# Altium PCB SideLine.PcbDoc
Units mm, origin at the board's own origin, x right, y up, seen from the top; angles counter-clockwise.
Board outline 84 x 12 mm, 2 copper layers (Top Layer, Bottom Layer); 57 components, 30 nets, 158 pads, 112 vias.
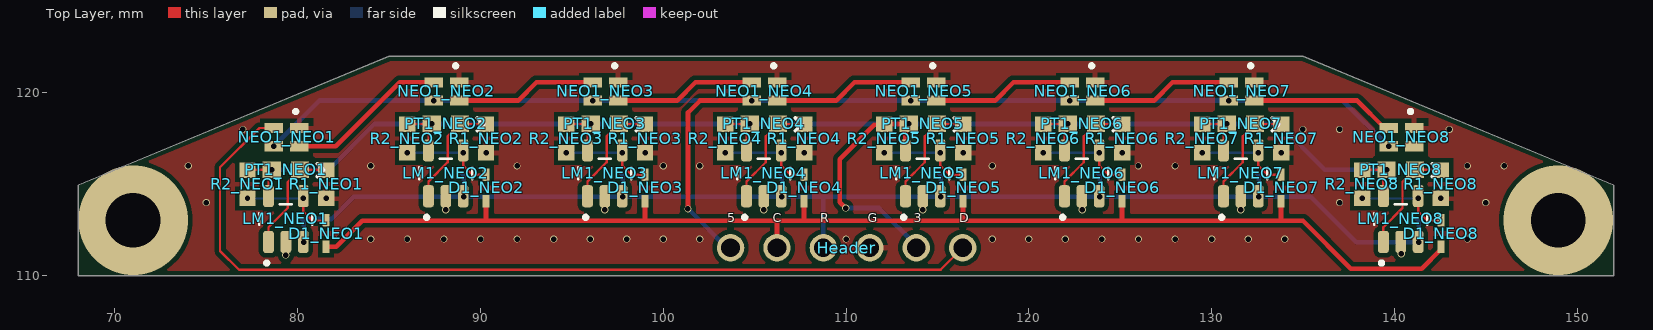
[diagram p0: Top Layer view]
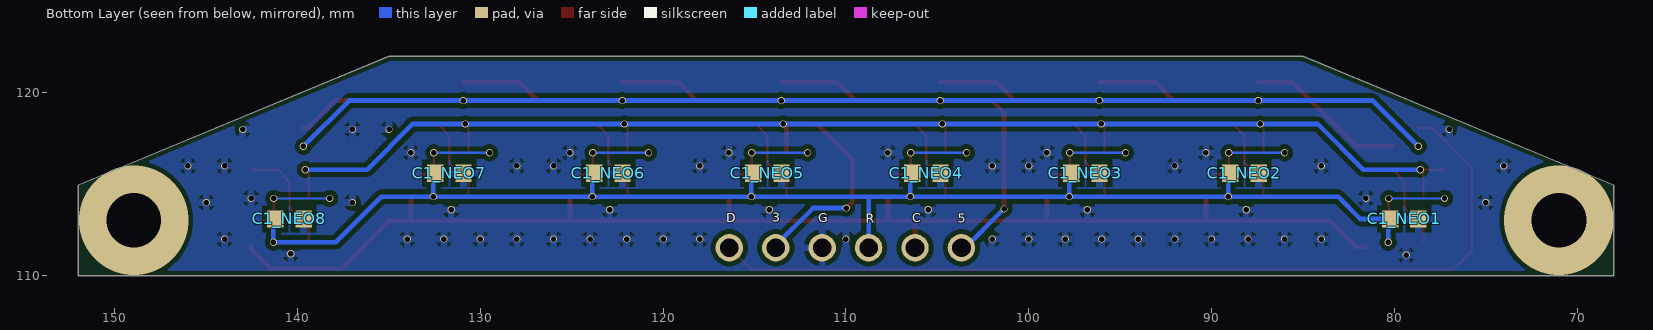
[diagram p1: Bottom Layer view, seen from below]
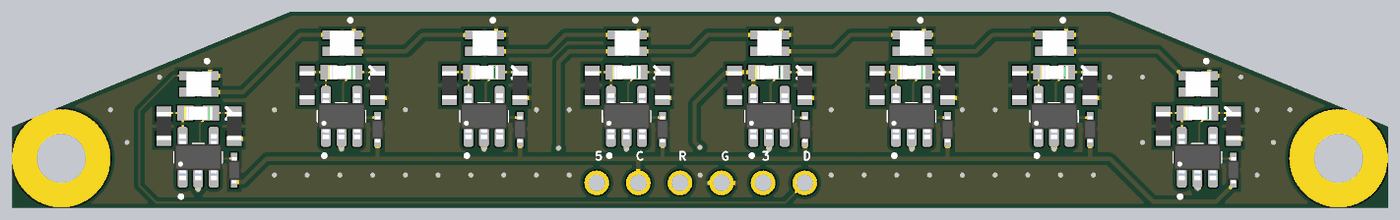
[diagram p2: 3D render of the assembled board from above, using the file's embedded part models]
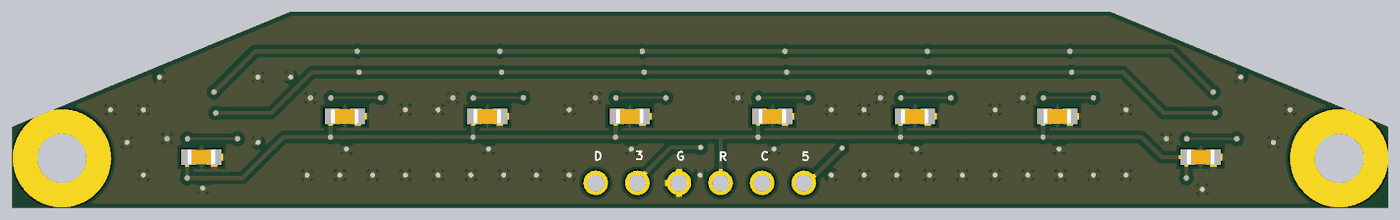
[diagram p3: 3D render of the assembled board from below, using the file's embedded part models]

## Layer stack, top to bottom
Top Solder: solder mask 0.0102, Solder Resist, Dk 3.5
Top Layer: signal copper 0.0356
Dielectric 1: dielectric 0.32, FR-4, Dk 4.8
Bottom Layer: signal copper 0.0356
Bottom Solder: solder mask 0.0102, Solder Resist, Dk 3.5

## Board outline
68,110 152,110 152,114.958 135,122 85,122 68,114.958

## Design rules (kind name [scope] priority, off if disabled: settings)
BoardOutlineClearance [All] p1: gap=0.254 ignorepadtopadclearanceinfootprint=FALSE except(0: Arc-SplitContinuation Track-SplitContinuation SMDPad-SplitContinuation THPad-SplitContinuation Via-SplitContinuation Fill-SplitContinuation Poly-SplitContinuation Region-SplitContinuation Text-SplitContinuation)
Clearance [All] p1: gap=0.254 ignorepadtopadclearanceinfootprint=TRUE
PolygonConnect [All] p1: connectstyle=Relief reliefconductorwidth=0.4 reliefentries=4 polygonreliefangle="90 Angle" airgapwidth=0.254
RoomDefinition NEO8 [InComponentClass('NEO8')] p1: confinementstyle=ConfineIn formatcopy=TRUE lockcomponents=FALSE outline 137.25,110.2 143.75,110.2 143.75,119.5 137.25,119.5
RoomDefinition NEO3 [InComponentClass('NEO3')] p2: confinementstyle=ConfineIn formatcopy=TRUE lockcomponents=FALSE outline 93.7,112.7 100.2,112.7 100.2,122 93.7,122
RoomDefinition NEO5 [InComponentClass('NEO5')] p3: confinementstyle=ConfineIn formatcopy=TRUE lockcomponents=FALSE outline 111.1,112.7 117.6,112.7 117.6,122 111.1,122
RoomDefinition NEO4 [InComponentClass('NEO4')] p4: confinementstyle=ConfineIn formatcopy=TRUE lockcomponents=FALSE outline 102.4,112.7 108.9,112.7 108.9,122 102.4,122
RoomDefinition NEO2 [InComponentClass('NEO2')] p5: confinementstyle=ConfineIn formatcopy=TRUE lockcomponents=FALSE outline 85,112.7 91.5,112.7 91.5,122 85,122
RoomDefinition NEO7 [InComponentClass('NEO7')] p6: confinementstyle=ConfineIn formatcopy=TRUE lockcomponents=FALSE outline 128.5,112.7 135,112.7 135,122 128.5,122
RoomDefinition NEO6 [InComponentClass('NEO6')] p7: confinementstyle=ConfineIn formatcopy=TRUE lockcomponents=FALSE outline 119.8,112.7 126.3,112.7 126.3,122 119.8,122
RoomDefinition NEO1 [InComponentClass('NEO1')] p8: confinementstyle=ConfineIn formatcopy=TRUE lockcomponents=FALSE outline 76.25,110.2 82.75,110.2 82.75,119.5 76.25,119.5
RoutingVias [All] p1: holewidth=0.711 width=1.27 viastyle="Through Hole" minholewidth=0.711 minwidth=1.27 maxholewidth=0.711 maxwidth=1.27
SolderMaskExpansion [All] p1: expansion=0.102 istentingtop=FALSE
SupplyNets "Schematic Supply Nets_3" [InNet('+3V3')] p1: voltage=0.000
SupplyNets "Schematic Supply Nets_2" [InNet('+5V')] p2: voltage=0.000
SupplyNets "Schematic Supply Nets_1" [InNet('+VREF')] p3: voltage=0.000
SupplyNets "Schematic Supply Nets" [InNet('GND')] p4: voltage=0.000
Width [All] p1: maxlimit=0.254 minlimit=0.1 preferedwidth=0.254
30 further rules are at their usual default settings.

## Classes and differential pairs
component class Connexions: Header
channel class Sensors: NEO1 NEO2 NEO3 NEO4 NEO5 NEO6 NEO7 NEO8
net class DIN[2..8]: DIN2 DIN3 DIN4 DIN5 DIN6 DIN7 DIN8
component class NEO8: C1_NEO8 D1_NEO8 LM1_NEO8 NEO1_NEO8 PT1_NEO8 R1_NEO8 R2_NEO8
component class NEO7: C1_NEO7 D1_NEO7 LM1_NEO7 NEO1_NEO7 PT1_NEO7 R1_NEO7 R2_NEO7
component class NEO6: C1_NEO6 D1_NEO6 LM1_NEO6 NEO1_NEO6 PT1_NEO6 R1_NEO6 R2_NEO6
component class NEO5: C1_NEO5 D1_NEO5 LM1_NEO5 NEO1_NEO5 PT1_NEO5 R1_NEO5 R2_NEO5
component class NEO4: C1_NEO4 D1_NEO4 LM1_NEO4 NEO1_NEO4 PT1_NEO4 R1_NEO4 R2_NEO4
component class NEO3: C1_NEO3 D1_NEO3 LM1_NEO3 NEO1_NEO3 PT1_NEO3 R1_NEO3 R2_NEO3
component class NEO2: C1_NEO2 D1_NEO2 LM1_NEO2 NEO1_NEO2 PT1_NEO2 R1_NEO2 R2_NEO2
component class NEO1: C1_NEO1 D1_NEO1 LM1_NEO1 NEO1_NEO1 PT1_NEO1 R1_NEO1 R2_NEO1

## Components (designator, comment, footprint, x,y, rotation, side; value= is the part's Value field where it differs from the comment)
C1_NEO1 "1UF" CAP_0603 79.45,113.1 r0 bottom (schematic designator C1)
C1_NEO2 "1UF" CAP_0603 88.2,115.6 r0 bottom (schematic designator C1)
C1_NEO3 "1UF" CAP_0603 96.9,115.6 r0 bottom (schematic designator C1)
C1_NEO4 "1UF" CAP_0603 105.6,115.6 r0 bottom (schematic designator C1)
C1_NEO5 "1UF" CAP_0603 114.3,115.6 r0 bottom (schematic designator C1)
C1_NEO6 "1UF" CAP_0603 123,115.6 r0 bottom (schematic designator C1)
C1_NEO7 "1UF" CAP_0603 131.7,115.6 r0 bottom (schematic designator C1)
C1_NEO8 "1UF" CAP_0603 140.45,113.1 r0 bottom (schematic designator C1)
D1_NEO1 "BAT41KFILM" BAT41KFILM 81.55,112.3 r90 top (schematic designator D1)
D1_NEO2 "BAT41KFILM" BAT41KFILM 90.3,114.8 r90 top (schematic designator D1)
D1_NEO3 "BAT41KFILM" BAT41KFILM 99,114.8 r90 top (schematic designator D1)
D1_NEO4 "BAT41KFILM" BAT41KFILM 107.7,114.8 r90 top (schematic designator D1)
D1_NEO5 "BAT41KFILM" BAT41KFILM 116.4,114.8 r90 top (schematic designator D1)
D1_NEO6 "BAT41KFILM" BAT41KFILM 125.1,114.8 r90 top (schematic designator D1)
D1_NEO7 "BAT41KFILM" BAT41KFILM 133.8,114.8 r90 top (schematic designator D1)
D1_NEO8 "BAT41KFILM" BAT41KFILM 142.55,112.3 r90 top (schematic designator D1)
Header "6PIN-TH" 6PIN-TH 110,111.525 r180 top
LM1_NEO1 "LMV331IDBVR" LMV331IDBVR 79.35,113.1 r90 top (schematic designator LM1)
LM1_NEO2 "LMV331IDBVR" LMV331IDBVR 88.1,115.6 r90 top (schematic designator LM1)
LM1_NEO3 "LMV331IDBVR" LMV331IDBVR 96.8,115.6 r90 top (schematic designator LM1)
LM1_NEO4 "LMV331IDBVR" LMV331IDBVR 105.5,115.6 r90 top (schematic designator LM1)
LM1_NEO5 "LMV331IDBVR" LMV331IDBVR 114.2,115.6 r90 top (schematic designator LM1)
LM1_NEO6 "LMV331IDBVR" LMV331IDBVR 122.9,115.6 r90 top (schematic designator LM1)
LM1_NEO7 "LMV331IDBVR" LMV331IDBVR 131.6,115.6 r90 top (schematic designator LM1)
LM1_NEO8 "LMV331IDBVR" LMV331IDBVR 140.35,113.1 r90 top (schematic designator LM1)
NEO1_NEO1 "LED1515" LED1515 79.387,117.579 r270 top (schematic designator NEO1)
NEO1_NEO2 "LED1515" LED1515 88.137,120.079 r270 top (schematic designator NEO1)
NEO1_NEO3 "LED1515" LED1515 96.837,120.079 r270 top (schematic designator NEO1)
NEO1_NEO4 "LED1515" LED1515 105.537,120.079 r270 top (schematic designator NEO1)
NEO1_NEO5 "LED1515" LED1515 114.237,120.079 r270 top (schematic designator NEO1)
NEO1_NEO6 "LED1515" LED1515 122.937,120.079 r270 top (schematic designator NEO1)
NEO1_NEO7 "LED1515" LED1515 131.637,120.079 r270 top (schematic designator NEO1)
NEO1_NEO8 "LED1515" LED1515 140.387,117.579 r270 top (schematic designator NEO1)
PT1_NEO1 "ALS-PT19" ALS-PT19 79.35,115.8 r0 top (schematic designator PT1)
PT1_NEO2 "ALS-PT19" ALS-PT19 88.1,118.3 r0 top (schematic designator PT1)
PT1_NEO3 "ALS-PT19" ALS-PT19 96.8,118.3 r0 top (schematic designator PT1)
PT1_NEO4 "ALS-PT19" ALS-PT19 105.5,118.3 r0 top (schematic designator PT1)
PT1_NEO5 "ALS-PT19" ALS-PT19 114.2,118.3 r0 top (schematic designator PT1)
PT1_NEO6 "ALS-PT19" ALS-PT19 122.9,118.3 r0 top (schematic designator PT1)
PT1_NEO7 "ALS-PT19" ALS-PT19 131.6,118.3 r0 top (schematic designator PT1)
PT1_NEO8 "ALS-PT19" ALS-PT19 140.35,115.8 r0 top (schematic designator PT1)
R1_NEO1 "10KΩ" RES_0603 81.55,115 r90 top (schematic designator R1)
R1_NEO2 "10KΩ" RES_0603 90.3,117.5 r90 top (schematic designator R1)
R1_NEO3 "10KΩ" RES_0603 99,117.5 r90 top (schematic designator R1)
R1_NEO4 "10KΩ" RES_0603 107.7,117.5 r90 top (schematic designator R1)
R1_NEO5 "10KΩ" RES_0603 116.4,117.5 r90 top (schematic designator R1)
R1_NEO6 "10KΩ" RES_0603 125.1,117.5 r90 top (schematic designator R1)
R1_NEO7 "10KΩ" RES_0603 133.8,117.5 r90 top (schematic designator R1)
R1_NEO8 "10KΩ" RES_0603 142.55,115 r90 top (schematic designator R1)
R2_NEO1 "4.7KΩ" RES_0603 77.25,115 r90 top (schematic designator R2)
R2_NEO2 "4.7KΩ" RES_0603 86,117.5 r90 top (schematic designator R2)
R2_NEO3 "4.7KΩ" RES_0603 94.7,117.5 r90 top (schematic designator R2)
R2_NEO4 "4.7KΩ" RES_0603 103.4,117.5 r90 top (schematic designator R2)
R2_NEO5 "4.7KΩ" RES_0603 112.1,117.5 r90 top (schematic designator R2)
R2_NEO6 "4.7KΩ" RES_0603 120.8,117.5 r90 top (schematic designator R2)
R2_NEO7 "4.7KΩ" RES_0603 129.5,117.5 r90 top (schematic designator R2)
R2_NEO8 "4.7KΩ" RES_0603 138.25,115 r90 top (schematic designator R2)

## Footprints (in the part's own frame and the unit in brackets; to place one, negate y for a bottom-side part, rotate by r counter-clockwise, add the part's x,y. Pads: shape width x height; smd on the part's side, far side on the other; paste and mask are expansions set on the pad)
6PIN-TH [mm]
  round 1.5 hole 1.02: 1(-6.38,0) 2(-3.84,0) 3(-1.3,0) 4(1.24,0) 5(3.78,0) 6(6.32,0)
ALS-PT19 [mm]
  rect 1x0.9 smd: C(-0.775,0) E(0.775,0)
  silkscreen extent 1.72,-0.38 2.07,0.32, body extent -0.85,-0.41 0.85,0.39, height 0.6
BAT41KFILM [mm]
  rect 0.69x0.4 smd: A(0.72,0) C(-0.72,0)
  body extent -0.8,-0.4 0.8,0.4, height 0.7
CAP_0603 [mm] "Chip Capacitor, 2-Leads, Body 1.60x0.80mm, IPC Medium Density"
  rect 0.9x0.95 smd: 1(-0.775,0) 2(0.775,0)
  body extent -0.85,-0.45 0.85,0.45, height 0.55
LED1515 [mm]
  rect 0.55x1 smd: DIN(-0.5,-0.7) DOUT(0.5,0.7) GND(-0.5,0.7) VDD(0.5,-0.7)
  silkscreen extent -1.5,0.4 -1.3,0.6, body extent -0.75,-0.75 0.75,0.75, height 0.65
LMV331IDBVR [mm]
  rrect50% 1.21x0.59 smd: 1(-1.255,0.95) 2(-1.255,0) 3(-1.255,-0.95) 4(1.255,-0.95) 5(1.255,0.95)
  silkscreen extent -2.51,-1.45 0.8,1.45, body extent -1.4,-1.45 1.4,1.45, height 1.45
RES_0603 [mm] "Chip Resistor, 2-Leads, Body 1.60x0.80mm, IPC Medium Density"
  rect 0.85x0.9 smd: 1(-0.775,0) 2(0.775,0)
  body extent -0.85,-0.45 0.85,0.45, height 0.55

## Part data
C1_NEO1 C1_NEO2 C1_NEO3 C1_NEO4 C1_NEO5 C1_NEO6 C1_NEO7 C1_NEO8: library part CAP_0603, "Capacitor SMD 0603 generic"
R1_NEO1 R1_NEO2 R1_NEO3 R1_NEO4 R1_NEO5 R1_NEO6 R1_NEO7 R1_NEO8 R2_NEO1 R2_NEO2 R2_NEO3 R2_NEO4 R2_NEO5 R2_NEO6 R2_NEO7 R2_NEO8: library part RES_0603, "Resistor SMD 0603 generic"

## Via types
v1: diameter 0.4, hole 0.3, Top Layer to Bottom Layer, tented both sides, 110 vias
v2: diameter 6, hole 3, Top Layer to Bottom Layer, 2 vias

## Nets (pads, with @x,y where several pads share a name; then routed paths per layer and width w, separated by ;. In a path a pad name is that pad's centre, name@x,y a point inside that pad or via, vN(x,y) a via of type N, cw(c..) or ccw(c..) an arc to the next point about the centre after c; other vN are vias at no path point)
+3V3: Header.2 LM1_NEO1.5 LM1_NEO2.5 LM1_NEO3.5 LM1_NEO4.5 LM1_NEO5.5 LM1_NEO6.5 LM1_NEO7.5 LM1_NEO8.5 PT1_NEO1.C PT1_NEO2.C PT1_NEO3.C PT1_NEO4.C PT1_NEO5.C PT1_NEO6.C PT1_NEO7.C PT1_NEO8.C R2_NEO1.2 R2_NEO2.2 R2_NEO3.2 R2_NEO4.2 R2_NEO5.2 R2_NEO6.2 R2_NEO7.2 R2_NEO8.2 | length 96.9
  Top Layer w0.127: R2_NEO1.2 77.275,115.8 v1(78.575,115.8) 78.4,115.625 LM1_NEO1.5 ; R2_NEO2.2 86.025,118.3 v1(87.325,118.3) 87.15,118.125 LM1_NEO2.5 ; R2_NEO3.2 94.725,118.3 v1(96.025,118.3) 95.85,118.125 LM1_NEO3.5 ; R2_NEO4.2 103.425,118.3 v1(104.725,118.3) 104.55,118.125 LM1_NEO4.5 ; R2_NEO6.2 120.825,118.3 v1(122.125,118.3) 121.95,118.125 LM1_NEO6.5 ; R2_NEO7.2 129.525,118.3 v1(130.825,118.3) 130.65,118.125 LM1_NEO7.5 ; R2_NEO8.2 138.275,115.8 v1(139.575,115.8) 139.4,115.625 LM1_NEO8.5
  Top Layer w0.254: v1(109.975,113.7) 109.65,114.025 109.65,116.375 111.534,118.259 112.084,118.259 R2_NEO5.2 112.125,118.3 v1(113.425,118.3) 113.25,118.125 LM1_NEO5.5
  Bottom Layer w0.254: v1(78.575,115.8) 81.7,115.8 84.2,118.3 v1(87.325,118.3) v1(96.025,118.3) v1(104.725,118.3) v1(113.425,118.3) v1(122.125,118.3) v1(130.825,118.3) 133.7,118.3 136.2,115.8 v1(139.575,115.8) ; v1(109.975,113.7) 111.8,113.7 113.84,111.66 Header.2@113.84,111.4
+5V: Header.6 NEO1_NEO1.VDD NEO1_NEO2.VDD NEO1_NEO3.VDD NEO1_NEO4.VDD NEO1_NEO5.VDD NEO1_NEO6.VDD NEO1_NEO7.VDD NEO1_NEO8.VDD | length 75.3
  Top Layer w0.254: v1(101.35,113.65) 101.35,118.922 102.007,119.579 v1(104.837,119.579)
  Bottom Layer w0.254: v1(78.687,117.079) 81.187,119.579 87.37,119.579 87.374,119.575 v1@87.374,119.553 ; v1(87.437,119.579) v1(96.137,119.579) v1(104.837,119.579) v1(113.537,119.579) v1(122.237,119.579) v1(130.937,119.579) 137.187,119.579 v1(139.687,117.079) ; v1(101.35,113.65) 103.6,111.4 Header.6@103.68,111.4
+VREF: C1_NEO1.2 C1_NEO2.2 C1_NEO3.2 C1_NEO4.2 C1_NEO5.2 C1_NEO6.2 C1_NEO7.2 C1_NEO8.2 Header.4 LM1_NEO1.3 LM1_NEO2.3 LM1_NEO3.3 LM1_NEO4.3 LM1_NEO5.3 LM1_NEO6.3 LM1_NEO7.3 LM1_NEO8.3 | length 76
  Bottom Layer w0.254: C1_NEO1.2 80.325,113 v1(80.325,111.825) ; C1_NEO1.2@80.325,113.1 81.85,113.1 83.075,114.325 v1(89.075,114.325) ; C1_NEO2.2 89.075,115.5 v1(89.075,114.325) ; C1_NEO3.2 97.775,115.5 v1(97.775,114.325) ; C1_NEO4.2 106.475,115.5 v1(106.475,114.325) ; Header.4@108.76,111.4 108.76,114.315 ; C1_NEO5.2 115.175,115.5 v1(115.175,114.325) ; C1_NEO6.2 123.875,115.5 v1(123.875,114.325) ; C1_NEO7.2 132.575,115.5 v1(132.575,114.325) ; C1_NEO8.2 141.325,113 v1(141.325,111.825) ; v1@141.3,111.845 141.28,111.825 137.925,111.825 135.425,114.325 v1(132.575,114.325) ; v1(89.075,114.325) v1(97.775,114.325) ; v1(97.775,114.325) v1(106.475,114.325) ; v1(106.475,114.325) v1(115.175,114.325) ; v1(115.175,114.325) v1(123.875,114.325) ; v1(123.875,114.325) v1(132.575,114.325)
COMP1: D1_NEO1.C D1_NEO2.C D1_NEO3.C D1_NEO4.C D1_NEO5.C D1_NEO6.C D1_NEO7.C D1_NEO8.C Header.5 | length 71.4
  Top Layer w0.254: D1_NEO1.C 82.1,111.58 83.52,113 90.325,113 ; D1_NEO2.C 90.3,113.025 90.325,113 ; D1_NEO3.C 99,113.075 99.075,113 ; Header.5@106.22,111.4 106.22,112.97 ; D1_NEO4.C 107.7,113.05 107.75,113 ; D1_NEO5.C 116.4,113.025 116.425,113 ; D1_NEO6.C 125.1,113.05 125.15,113 ; D1_NEO7.C 133.8,113.075 133.875,113 ; D1_NEO8.C 142.55,111.435 141.496,110.381 137.619,110.381 135,113 133.875,113 ; 90.325,113 99.075,113 ; 99.075,113 107.75,113 ; 107.75,113 116.425,113 ; 116.425,113 125.15,113 ; 125.15,113 133.875,113
DIN1: Header.1 NEO1_NEO1.DIN | length 50
  Top Layer w0.127: NEO1_NEO1.DIN 77.904,118.079 75.75,115.925 75.75,111.35 76.783,110.317 115.172,110.317 Header.1
DIN2: NEO1_NEO1.DOUT NEO1_NEO2.DIN | length 8.8
  Top Layer w0.254: NEO1_NEO1.DOUT 82.086,117.079 85.586,120.579 NEO1_NEO2.DIN
DIN3: NEO1_NEO2.DOUT NEO1_NEO3.DIN | length 7.7
  Top Layer w0.254: NEO1_NEO2.DOUT 92.061,119.579 93.061,120.579 NEO1_NEO3.DIN
DIN4: NEO1_NEO3.DOUT NEO1_NEO4.DIN | length 7.7
  Top Layer w0.254: NEO1_NEO3.DOUT 100.761,119.579 101.761,120.579 NEO1_NEO4.DIN
DIN5: NEO1_NEO4.DOUT NEO1_NEO5.DIN | length 7.7
  Top Layer w0.254: NEO1_NEO4.DOUT 109.461,119.579 110.461,120.579 NEO1_NEO5.DIN
DIN6: NEO1_NEO5.DOUT NEO1_NEO6.DIN | length 7.7
  Top Layer w0.254: NEO1_NEO5.DOUT 118.161,119.579 119.161,120.579 NEO1_NEO6.DIN
DIN7: NEO1_NEO6.DOUT NEO1_NEO7.DIN | length 7.7
  Top Layer w0.254: NEO1_NEO6.DOUT 126.861,119.579 127.861,120.579 NEO1_NEO7.DIN
DIN8: NEO1_NEO7.DOUT NEO1_NEO8.DIN | length 8
  Top Layer w0.254: NEO1_NEO7.DOUT 137.962,119.579 139.462,118.079 NEO1_NEO8.DIN
DOUT8: NEO1_NEO8.DOUT
GND: C1_NEO1.1 C1_NEO2.1 C1_NEO3.1 C1_NEO4.1 C1_NEO5.1 C1_NEO6.1 C1_NEO7.1 C1_NEO8.1 Header.3 LM1_NEO1.2 LM1_NEO2.2 LM1_NEO3.2 LM1_NEO4.2 LM1_NEO5.2 LM1_NEO6.2 LM1_NEO7.2 LM1_NEO8.2 NEO1_NEO1.GND NEO1_NEO2.GND NEO1_NEO3.GND NEO1_NEO4.GND NEO1_NEO5.GND NEO1_NEO6.GND NEO1_NEO7.GND NEO1_NEO8.GND R1_NEO1.1 R1_NEO2.1 R1_NEO3.1 R1_NEO4.1 R1_NEO5.1 R1_NEO6.1 R1_NEO7.1 R1_NEO8.1
  other v1: 79.35,111.125 140.375,111.2 84,112 84,112 86,112 88,112 88,112 90,112 92,112 92,112 94,112 96,112 96,112 98,112 100,112 100,112 102,112 110,112 118,112 120,112 120,112 122,112 124,112 124,112 126,112 128,112 128,112 130,112 132,112 132,112 134,112 144,112 144,112 88.1,113.6 96.8,113.6 105.5,113.6 114.2,113.6 122.925,113.6 131.6,113.6 75,114 137,114 145,114 81.55,114.225 142.55,114.225 74,116 84,116 92,116 100,116 102,116 102,116 118,116 118,116 126,116 126,116 128,116 144,116 146,116 146,116 90.3,116.725 99,116.725 107.7,116.725 116.4,116.725 125.1,116.725 133.8,116.725 77,118 135,118 137,118 143,118
NetD1_NEO1_A: D1_NEO1.A LM1_NEO1.4 R2_NEO1.1 | length 5.1
  Top Layer w0.127: v1(80.3,114.225) 80.3,113.525 80.805,113.02 D1_NEO1.A
  Bottom Layer w0.127: v1(77.25,114.225) v1@80.17,114.225
NetD1_NEO2_A: D1_NEO2.A LM1_NEO2.4 R2_NEO2.1 | length 5.1
  Top Layer w0.127: v1(89.05,116.725) 89.05,116.025 89.555,115.52 D1_NEO2.A
  Bottom Layer w0.127: v1(86,116.725) v1@88.92,116.725
NetD1_NEO3_A: D1_NEO3.A LM1_NEO3.4 R2_NEO3.1 | length 5.1
  Top Layer w0.127: v1(97.75,116.725) 97.75,116.025 98.255,115.52 D1_NEO3.A
  Bottom Layer w0.127: v1(94.7,116.725) v1@97.62,116.725
NetD1_NEO4_A: D1_NEO4.A LM1_NEO4.4 R2_NEO4.1 | length 5.1
  Top Layer w0.127: v1(106.45,116.725) 106.45,116.025 106.955,115.52 D1_NEO4.A
  Bottom Layer w0.127: v1(103.4,116.725) v1@106.32,116.725
NetD1_NEO5_A: D1_NEO5.A LM1_NEO5.4 R2_NEO5.1 | length 5.1
  Top Layer w0.127: v1(115.15,116.725) 115.15,116.025 115.655,115.52 D1_NEO5.A
  Bottom Layer w0.127: v1(112.1,116.725) v1@115.02,116.725
NetD1_NEO6_A: D1_NEO6.A LM1_NEO6.4 R2_NEO6.1 | length 5.1
  Top Layer w0.127: v1(123.85,116.725) 123.85,116.025 124.355,115.52 D1_NEO6.A
  Bottom Layer w0.127: v1(120.8,116.725) v1@123.72,116.725
NetD1_NEO7_A: D1_NEO7.A LM1_NEO7.4 R2_NEO7.1 | length 5.1
  Top Layer w0.127: v1(132.55,116.725) 132.55,116.025 133.055,115.52 D1_NEO7.A
  Bottom Layer w0.127: v1(129.5,116.725) v1@132.42,116.725
NetD1_NEO8_A: D1_NEO8.A LM1_NEO8.4 R2_NEO8.1 | length 5.1
  Top Layer w0.127: v1(141.3,114.225) 141.3,113.525 141.805,113.02 D1_NEO8.A
  Bottom Layer w0.127: v1(138.25,114.225) v1@141.17,114.225
PD-1_NEO1: LM1_NEO1.1 PT1_NEO1.E R1_NEO1.2 | length 6.1
  Top Layer w0.127: LM1_NEO1.1 78.4,112.65 79.45,113.7 79.45,115.125 79.688,115.364 79.688,115.414 80.075,115.8 PT1_NEO1.E 81.525,115.8 R1_NEO1.2
PD-1_NEO2: LM1_NEO2.1 PT1_NEO2.E R1_NEO2.2 | length 6.1
  Top Layer w0.127: LM1_NEO2.1 87.15,115.15 88.2,116.2 88.2,117.625 88.438,117.864 88.438,117.914 88.825,118.3 PT1_NEO2.E 90.275,118.3 R1_NEO2.2
PD-1_NEO3: LM1_NEO3.1 PT1_NEO3.E R1_NEO3.2 | length 6.1
  Top Layer w0.127: LM1_NEO3.1 95.85,115.15 96.9,116.2 96.9,117.625 97.139,117.864 97.139,117.914 97.525,118.3 PT1_NEO3.E 98.975,118.3 R1_NEO3.2
PD-1_NEO4: LM1_NEO4.1 PT1_NEO4.E R1_NEO4.2 | length 6.1
  Top Layer w0.127: LM1_NEO4.1 104.55,115.15 105.6,116.2 105.6,117.625 105.839,117.864 105.839,117.914 106.225,118.3 PT1_NEO4.E 107.675,118.3 R1_NEO4.2
PD-1_NEO5: LM1_NEO5.1 PT1_NEO5.E R1_NEO5.2 | length 6.1
  Top Layer w0.127: LM1_NEO5.1 113.25,115.15 114.3,116.2 114.3,117.625 114.539,117.864 114.539,117.914 114.925,118.3 PT1_NEO5.E 116.375,118.3 R1_NEO5.2
PD-1_NEO6: LM1_NEO6.1 PT1_NEO6.E R1_NEO6.2 | length 6.1
  Top Layer w0.127: LM1_NEO6.1 121.95,115.15 123,116.2 123,117.625 123.239,117.864 123.239,117.914 123.625,118.3 PT1_NEO6.E 125.075,118.3 R1_NEO6.2
PD-1_NEO7: LM1_NEO7.1 PT1_NEO7.E R1_NEO7.2 | length 6.1
  Top Layer w0.127: LM1_NEO7.1 130.65,115.15 131.7,116.2 131.7,117.625 131.939,117.864 131.939,117.914 132.325,118.3 PT1_NEO7.E 133.775,118.3 R1_NEO7.2
PD-1_NEO8: LM1_NEO8.1 PT1_NEO8.E R1_NEO8.2 | length 6.1
  Top Layer w0.127: LM1_NEO8.1 139.4,112.65 140.45,113.7 140.45,115.125 140.688,115.364 140.688,115.414 141.075,115.8 PT1_NEO8.E 142.525,115.8 R1_NEO8.2
copper on no net:
  other v2: 70.993,113.03 148.971,113.03

## Polygon pours and split planes (outlines as drawn)
GND on Top Layer "GND_L01_P000" (solid, pour order 0): 68,110 68,123 152,123 152,110
GND on Bottom Layer "GND_L02_P001" (solid, pour order 1): 67.912,109.987 67.912,122.987 151.912,122.987 151.912,109.987

## Silkscreen, mask and mechanical layers (free items; w line width, h text height)
Top Overlay:
  text "5" at 103.5,112.925 h0.5
  text "C" at 106,112.925 h0.5
  text "R" at 108.6,112.925 h0.5
  text "G" at 111.2,112.925 h0.5
  text "3" at 113.7,112.925 h0.5
  text "D" at 116.2,112.925 h0.5
Bottom Overlay:
  text "3" at 114.025,112.95 h0.5
  text "C" at 106.375,112.925 h0.5
  text "G" at 111.525,112.925 h0.5
  text "D" at 116.55,112.925 h0.5
  text "5" at 103.875,112.9 h0.5
  text "R" at 108.925,112.9 h0.5
Mechanical 1:
  circle w0.013: c71,113 r1.5
  circle w0.013: c149,113 r1.5